# Altium PCB PCB.PcbDoc
Units mil, origin at the board's own origin, x right, y up, seen from the top; angles counter-clockwise.
Board outline 760 x 360 mil, 4 copper layers (Top Layer, Mid-Layer 1, Mid-Layer 2, Bottom Layer); 50 components, 32 nets, 152 pads, 68 vias.
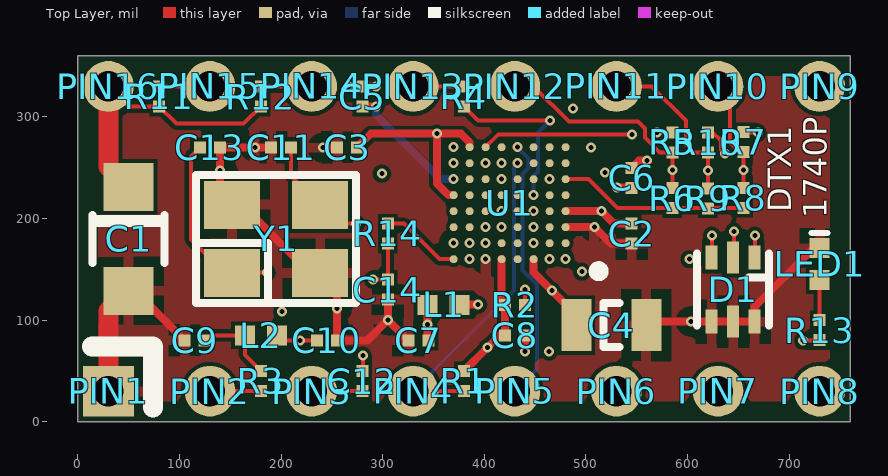
[diagram p0: Top Layer view]
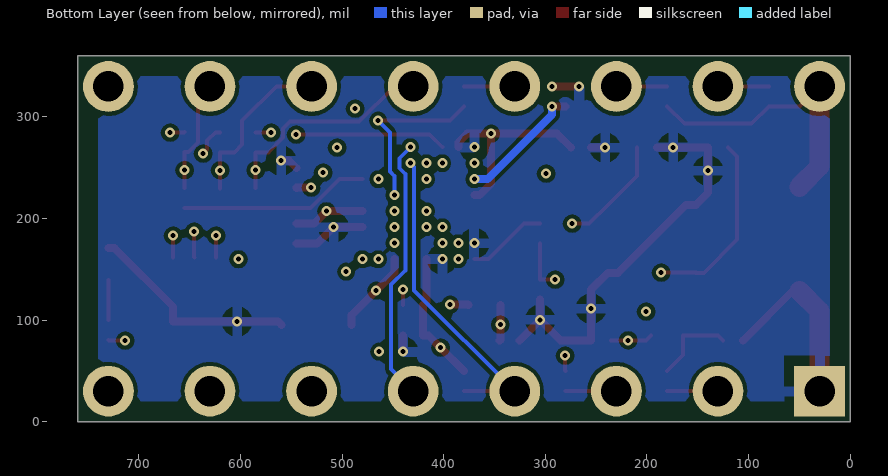
[diagram p1: Bottom Layer view, seen from below]
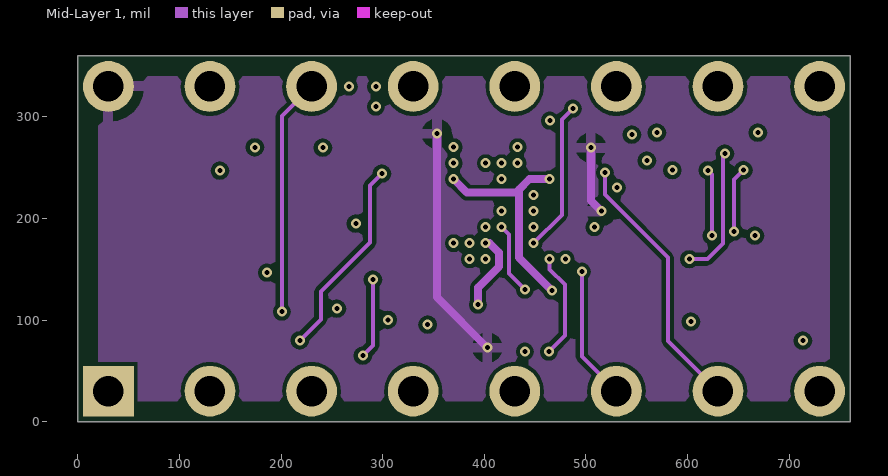
[diagram p2: Mid-Layer 1]
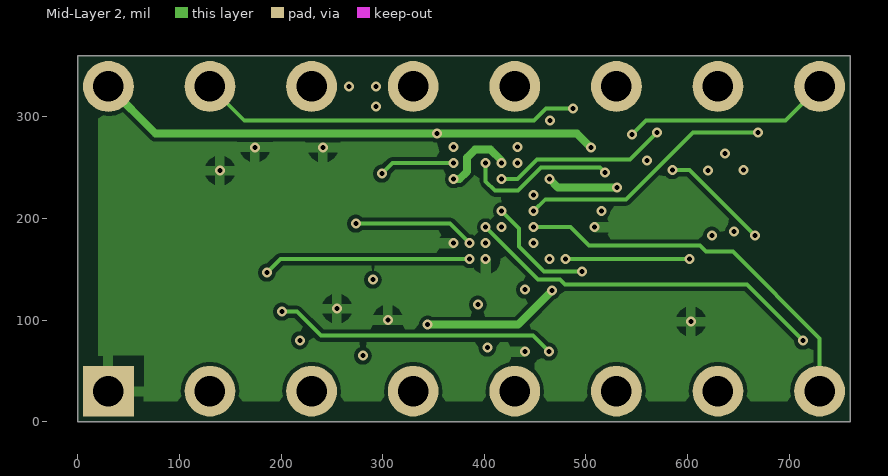
[diagram p3: Mid-Layer 2]

## Layer stack, top to bottom
Top Solder: solder mask 0.4, Solder Resist, Dk 3.5
Top Layer: signal copper 1.4
Dielectric1: core 12.6, FR-4, Dk 4.8
Mid-Layer 1: signal copper 1.4
Dielectric2: prepreg 12.6, FR-4, Dk 4.8
Mid-Layer 2: signal copper 1.4
Dielectric3: core 12.6, FR-4, Dk 4.8
Bottom Layer: signal copper 1.4
Bottom Solder: solder mask 0.4, Solder Resist, Dk 3.5

## Board outline
0,0 760,0 760,360 0,360

## Design rules (kind name [scope] priority, off if disabled: settings)
Clearance [All] p1: gap=3.94
ComponentClearance [All] p1: gap=7.87 collisioncheckmode=3 verticalgap=9.84 showdistances=FALSE
Height [All] p1: minheight=0 maxheight=3937.01 prefheight=39.37
HoleSize [All] p1: absolutevalues=TRUE maxlimit=984.25 minlimit=1 maxpercent=80.000 minpercent=20.000
HoleToHoleClearance [All] p1: gap=0 allowstackedmicrovias=TRUE
MinimumSolderMaskSliver [All] p1: minsoldermaskwidth=-3937.01
PolygonConnect [All] p1: connectstyle=Relief reliefconductorwidth=9.84 reliefentries=4 polygonreliefangle="90 Angle" airgapwidth=9.84
RoutingVias [All] p1: holewidth=3.94 width=9.84 viastyle="Through Hole" minholewidth=3.94 minwidth=9.84 maxholewidth=19.68 maxwidth=39.37
SilkToSilkClearance [All] p1: silktosilkclearance=-3937.01
SilkToSolderMaskClearance [IsPad] p1: minsilkscreentomaskgap=-3937.01 clearancetoexposedcopper=TRUE
SolderMaskExpansion [All] p1: expansion=4
Width [All] p1: maxlimit=98.43 minlimit=3.94 preferedwidth=3.94
23 further rules are at their usual default settings.

## Components (designator, comment, footprint, x,y, rotation, side; value= is the part's Value field where it differs from the comment)
C1 "33u/10V" "Case A (3216)" 50,180 r270 top locked
C2 "1n" _0201 545,185 r270 top
C3 "100n" _0201 265,270 r180 top
C4 "10u/10V" _0805+ 525,95 r0 top
C5 "1n" _0201 280,320 r90 top
C6 "100n" _0201 545,240 r90 top
C7 "1u" _0201 335,80 r180 top
C8 "1u" _0201 430,85 r0 top
C9 "10n" _0201 115,80 r0 top
C10 "1u" _0201 245,80 r180 top
C11 "18p" _0201 200,270 r0 top
C12 "470n" _0201 280,40 r270 top
C13 "18p" _0201 130,270 r180 top
C14 "10n" _0201 305,130 r90 top
D1 "BAS16VV" SOT666-6 645,130 r180 top
L1 "0R" _0402 360,115 r180 top
L2 "ACML-0402H-750-T" _0402 180,85 r0 top
LED1 "0402G" _0402+ 730,155 r270 top
PIN1 "Pin/Pad" "Pad T/H 45/90"#1 30,30 r0 top locked
PIN2 "Pin/Pad" "Pad T/H 45/90"#2 130,30 r0 top locked
PIN3 "Pin/Pad" "Pad T/H 45/90"#3 230,30 r0 top locked
PIN4 "Pin/Pad" "Pad T/H 45/90"#4 330,30 r0 top locked
PIN5 "Pin/Pad" "Pad T/H 45/90"#5 430,30 r0 top locked
PIN6 "Pin/Pad" "Pad T/H 45/90"#6 530,30 r0 top locked
PIN7 "Pin/Pad" "Pad T/H 45/90"#7 630,30 r0 top locked
PIN8 "Pin/Pad" "Pad T/H 45/90"#8 730,30 r0 top locked
PIN9 "Pin/Pad" "Pad T/H 45/90"#9 730,330 r0 top locked
PIN10 "Pin/Pad" "Pad T/H 45/90"#10 630,330 r0 top locked
PIN11 "Pin/Pad" "Pad T/H 45/90"#11 530,330 r0 top locked
PIN12 "Pin/Pad" "Pad T/H 45/90"#12 430,330 r0 top locked
PIN13 "Pin/Pad" "Pad T/H 45/90"#13 330,330 r0 top locked
PIN14 "Pin/Pad" "Pad T/H 45/90"#14 230,330 r0 top locked
PIN15 "Pin/Pad" "Pad T/H 45/90"#15 130,330 r0 top locked
PIN16 "Pin/Pad" "Pad T/H 45/90"#16 30,330 r0 top locked
R1 "100k" _0201 380,40 r90 top
R2 "10R" _0201 430,115 r180 top
R3 "1k" _0201 180,40.16 r90 top
R4 "1k" _0201 380,320 r90 top
R5 "510R" _0201 585,275 r90 top
R6 "1k" _0201 585,220 r90 top
R7 "510R" _0201 655,275.16 r90 top
R8 "1k" _0201 655,220.16 r90 top
R9 "1k" _0201 620,219.84 r90 top
R10 "510R" _0201 620,274.84 r90 top
R11 "100k" _0201 80,320 r270 top
R12 "100k" _0201 180,320 r270 top
R13 "1k" _0201 730,90 r270 top
R14 "1k" _0201 305,185 r90 top
U1 "ATSAM4S8BA-UUR" WLCSP64 425,215 r180 top locked
Y1 "CX3225GB12000P0HPQCC" "Crystal 32x25 (4)" 195,180 r0 top

## Footprints (in the part's own frame and the unit in brackets; to place one, negate y for a bottom-side part, rotate by r counter-clockwise, add the part's x,y. Pads: shape width x height; smd on the part's side, far side on the other; paste and mask are expansions set on the pad)
_0201 [mm] "Body 0.6x0.3mm"
  rect 0.3x0.3 smd: 1(-0.25,0) 2(0.25,0)
  body extent -0.32,-0.18 0.33,0.17, height 0.3
_0402 [mm]
  rect 0.5x0.5 smd: 1(-0.4,0) 2(0.4,0)
  body extent -0.53,-0.27 0.53,0.28, height 0.5
_0402+ [mm]
  rect 0.5x0.5 smd: 1(-0.4,0) 2(0.4,0)
  silkscreen extent -0.77,-0.2 -0.77,0.2, body extent -0.53,-0.27 0.53,0.28, height 0.5
_0805+ [mm]
  rect 0.75x1.3 smd: 1(-0.875,0) 2(0.875,0)
  silkscreen extent -0.2,-0.55 0.2,0.55, body extent -1.02,-0.65 1.02,0.65, height 0.85
"Case A (3216)" [mm]
  rect 1.2x1.25 smd: 1(-1.3,0) 2(1.3,0)
  silkscreen extent -0.6,-0.9 0.6,0.9, body extent -1.65,-0.85 1.65,0.85, height 1.6
"Crystal 32x25 (4)" [mm] "Crystal 3.2 x 2.5 mm, 4 pins"
  rect 1.4x1.2 smd: 1(-1.1,-0.85) 2(1.1,0.85) 3(-1.1,0.85) 3(1.1,-0.85)
  silkscreen extent -2,-1.6 2,1.6, body extent -1.6,-1.3 1.6,1.3, height 0.7
"Pad T/H 45/90"#1 [mil] "Single pad, through-hole, 45mil/90mil"
  rect 50x50 hole 30: 1(0,0)
"Pad T/H 45/90"#2 [mil] "Single pad, through-hole, 45mil/90mil"
  round 50 hole 30: 2(0,0)
"Pad T/H 45/90"#3 [mil] "Single pad, through-hole, 45mil/90mil"
  round 50 hole 30: 3(0,0)
"Pad T/H 45/90"#4 [mil] "Single pad, through-hole, 45mil/90mil"
  round 50 hole 30: 4(0,0)
"Pad T/H 45/90"#5 [mil] "Single pad, through-hole, 45mil/90mil"
  round 50 hole 30: 5(0,0)
"Pad T/H 45/90"#6 [mil] "Single pad, through-hole, 45mil/90mil"
  round 50 hole 30: 6(0,0)
"Pad T/H 45/90"#7 [mil] "Single pad, through-hole, 45mil/90mil"
  round 50 hole 30: 7(0,0)
"Pad T/H 45/90"#8 [mil] "Single pad, through-hole, 45mil/90mil"
  round 50 hole 30: 8(0,0)
"Pad T/H 45/90"#9 [mil] "Single pad, through-hole, 45mil/90mil"
  round 50 hole 30: 9(0,0)
"Pad T/H 45/90"#10 [mil] "Single pad, through-hole, 45mil/90mil"
  round 50 hole 30: 10(0,0)
"Pad T/H 45/90"#11 [mil] "Single pad, through-hole, 45mil/90mil"
  round 50 hole 30: 11(0,0)
"Pad T/H 45/90"#12 [mil] "Single pad, through-hole, 45mil/90mil"
  round 50 hole 30: 12(0,0)
"Pad T/H 45/90"#13 [mil] "Single pad, through-hole, 45mil/90mil"
  round 50 hole 30: 13(0,0)
"Pad T/H 45/90"#14 [mil] "Single pad, through-hole, 45mil/90mil"
  round 50 hole 30: 14(0,0)
"Pad T/H 45/90"#15 [mil] "Single pad, through-hole, 45mil/90mil"
  round 50 hole 30: 15(0,0)
"Pad T/H 45/90"#16 [mil] "Single pad, through-hole, 45mil/90mil"
  round 50 hole 30: 16(0,0)
SOT666-6 [mm] "SOT666, 6 pins, 0.5mm pitch1.7 x 1.7mm"
  rect 0.3x0.6 smd: 1(-0.537,-0.8) 3(0.537,-0.8) 4(0.537,0.8) 6(-0.537,0.8)
  rect 0.3x0.8 smd: 2(0,-0.8) 5(0,0.8)
  silkscreen extent -0.9,-0.9 0.9,0.9, body extent -0.9,-0.9 0.9,0.9, height 0.55
WLCSP64 [mm] "BGA, 64-Leads, Body 4.42x3.42mmx0.53mm, Pitch 0.40mm"
  round 0.2 smd: A1(-1.4,1.4) A2(-1,1.4) A3(-0.6,1.4) A4(-0.2,1.4) A5(0.2,1.4) A6(0.6,1.4) A7(1,1.4) A8(1.4,1.4) B1(-1.4,1) B2(-1,1) B3(-0.6,1) B4(-0.2,1) B5(0.2,1) B6(0.6,1) B7(1,1) B8(1.4,1) C1(-1.4,0.6) C2(-1,0.6) C3(-0.6,0.6) C4(-0.2,0.6) C5(0.2,0.6) C6(0.6,0.6) C7(1,0.6) C8(1.4,0.6) D1(-1.4,0.2) D2(-1,0.2) D3(-0.6,0.2) D4(-0.2,0.2) D5(0.2,0.2) D6(0.6,0.2) D7(1,0.2) D8(1.4,0.2) E1(-1.4,-0.2) E2(-1,-0.2) E3(-0.6,-0.2) E4(-0.2,-0.2) E5(0.2,-0.2) E6(0.6,-0.2) E7(1,-0.2) E8(1.4,-0.2) F1(-1.4,-0.6) F2(-1,-0.6) F3(-0.6,-0.6) F4(-0.2,-0.6) F5(0.2,-0.6) F6(0.6,-0.6) F7(1,-0.6) F8(1.4,-0.6) G1(-1.4,-1) G2(-1,-1) G3(-0.6,-1) G4(-0.2,-1) G5(0.2,-1) G6(0.6,-1) G7(1,-1) G8(1.4,-1) H1(-1.4,-1.4) H2(-1,-1.4) H3(-0.6,-1.4) H4(-0.2,-1.4) H5(0.2,-1.4) H6(0.6,-1.4) H7(1,-1.4) H8(1.4,-1.4)
  silkscreen extent -2.35,1.58 -2.1,1.82, body extent -2.21,-1.71 2.21,1.71, height 0.54

## Part data
C1 C4: library part Capacitor+, "Polar capacitor"
C2 C3 C5 C6 C7 C8 C9 C10 C11 C12 C13 C14: library part Capacitor, "Capacitor"
D1: library part "Diode Triple", "Diode (triple)"
L1 L2: library part Inductor, "Inductor"
LED1: library part LED, "Light Emitting Diode"
PIN1 PIN2 PIN3 PIN4 PIN5 PIN6 PIN7 PIN8 PIN9 PIN10 PIN11 PIN12 PIN13 PIN14 PIN15 PIN16: "Single pin/pad"
R1 R2 R3 R4 R5 R6 R7 R8 R9 R10 R11 R12 R13 R14: library part Resistor, "Resistor"
U1: library part "AT91SAM4S16Bx WLCSP64", "ARM Cortex M4-based Flash MCU"
Y1: library part "Crystal (ground)", "Crystal Resonator"

## Via types
v1: diameter 9.84, hole 4.92, Top Layer to Bottom Layer, tented both sides, 45 vias
v2: diameter 9.84, hole 4.92, Top Layer to Bottom Layer, tented bottom, 23 vias

## Nets (pads, with @x,y where several pads share a name; then routed paths per layer and width w, separated by ;. In a path a pad name is that pad's centre, name@x,y a point inside that pad or via, vN(x,y) a via of type N, cw(c..) or ccw(c..) an arc to the next point about the centre after c; other vN are vias at no path point)
+3V3: C1.1 C2.1 C3.1 C8.1 PIN16.16 R1.2 R2.2 R11.2 R12.2 U1.A5 U1.D1 U1.E8 U1.H7 | length 1473.2
  Top Layer w3.94: PIN16.16 49.84,310.16 R11.2 96.85,293.31 163.15,293.31 R12.2
  Top Layer w7.87: C3.1 288.31,283.46 v1(353.35,283.46) ; U1.E8 364.72,222.87 353.35,234.25 v1(353.35,283.46) ; R1.2 v1(402.99,72.83) 415.16,85 C8.1 R2.2 417.13,118.03 U1.A5 ; U1.H7 385.63,274.8 376.97,283.46 v1(353.35,283.46) ; U1.D1 v1(515.31,207.13) 527.6,194.84 C2.1
  Top Layer w19.68: PIN16.16 30,251.18 C1.1
  Mid-Layer 1 w7.87: v1(353.35,283.46) 353.35,122.48 v1(402.99,72.83) ; v1(504.92,269.68) 504.92,217.52 v1(515.31,207.13)
  Mid-Layer 2 w7.87: PIN16.16 76.54,283.46 v1(353.35,283.46) 491.14,283.46 v1(504.92,269.68)
B: R7.2 U1.D3 | length 267.2
  Top Layer w3.94: R7.2 655.55,284.45 v1(669.29,284.45)
  Mid-Layer 2 w3.94: v2(448.62,207.13) 460,218.5 539.37,218.5 605.32,284.45 v1(669.29,284.45)
G: R10.2 U1.A1 | length 281.1
  Top Layer w3.94: R10.2 624.76,284.69 632.87,276.57 632.87,267.72 v1(636.81,263.78)
  Mid-Layer 1 w3.94: v1(601.93,159.88) 619.53,159.88 634.84,175.2 634.84,261.81 v1(636.81,263.78)
  Mid-Layer 2 w3.94: v2(480.12,159.88) v1(601.93,159.88)
GND: C1.2 C2.2 C3.2 C4.2 C5.2 C6.2 C7.2 C8.2 C9.1 C10.1 C11.1 C13.1 C14.1 D1.4 D1.5 D1.6 LED1.1 PIN1.1 U1.A6 U1.B8 U1.C1 U1.H8 Y1.3 | length 945.9
  Top Layer w7.87: C1.2 56.34,128.82 C9.1 ; C11.1 v1(174.21,270) C13.1 v1(139.84,247.05) 139.84,225.31 151.69,213.46 161.54,213.46 228.46,146.54 238.31,146.54 254.84,130 C10.1 284.84,80 v1(305,100.16) ; v1(241.14,269.69) 254.84,269.69 C3.2 ; v1(266.73,329.72) 279.88,329.72 C5.2 293.19,329.84 v1(293.31,329.72) ; C14.1 v1(305,100.16) ; C7.2 v1(305,100.16) ; C8.2 439.96,84.88 v1(439.96,68.9) ; U1.C1 v1(508.43,191.38) 524.65,175.16 C2.2 ; C6.2 552.05,256.89 v1(560.04,256.89) ; C4.2 562.95,98.5 v1(603.35,98.5) D1.4 D1.5 D1.6 666.16,113.01 723.9,170.75 LED1.1
  Top Layer w19.68: PIN1.1 30,108.82 C1.2
  other v1: 254.92,111.22
  other v2: 401.38,159.88 369.88,175.63 369.88,270.12
NetC4_1: C4.1 C5.1 C6.1 C7.1 L1.2 U1.A3 U1.F2 U1.F8 U1.G5 | length 754.5
  Top Layer w7.87: C5.1 293.19,310.16 v1(293.31,310.04) ; L1.2 v1(344.25,95.47) 344.25,80.59 C7.1 ; U1.A3 448.62,146.85 490.55,104.92 C4.1 ; v1(530.51,230.31) 544.84,230.31 C6.1
  Mid-Layer 1 w7.87: v2(369.88,238.62) 383.11,225.39 431.1,225.39 434.06,228.35 ; v2(464.37,238.62) 444.33,238.62 434.06,228.35 ; v1(466.54,128.94) 434.06,161.42 434.06,228.35
  Mid-Layer 2 w7.87: v1(344.25,95.47) 433.07,95.47 v1(466.54,128.94) ; v2(369.88,238.62) 375.43,238.62 382.87,246.06 382.87,259.84 390.75,267.72 406.13,267.72 417.13,256.72 v2(417.13,254.37) ; v2(464.37,238.62) 472.68,230.31 v1(530.51,230.31)
  Bottom Layer w7.87: v1(293.31,310.04) 293.31,302.17 356.85,238.62 v2(369.88,238.62)
NetC9_2: C9.2 L2.1 R3.2 | length 83
  Top Layer w3.94: C9.2 129.84,85 L2.1 164.25,65.75 R3.2
NetC10_2: C10.2 L2.2 U1.G8 | length 313.9
  Top Layer w3.94: L2.2 200.75,80 v1(218.5,80) C10.2
  Mid-Layer 1 w3.94: v1(218.5,80) 239.17,100.67 239.17,127.95 287.4,176.18 287.4,232.28 v1(299.21,244.09)
  Mid-Layer 2 w3.94: v1(299.21,244.09) 309.49,254.37 v2(369.88,254.37)
NetC11_2: C11.2 U1.B7 Y1.2 | length 231.3
  Top Layer w3.94: C11.2 209.84,241.93 Y1.2 256.89,194.88 v1(273.62,194.88)
  Mid-Layer 2 w3.94: v1(273.62,194.88) 366.38,194.88 v2(385.63,175.63)
NetC12_1: C12.1 C14.2 R14.1 | length 144.2
  Top Layer w3.94: C12.1 280.51,50.35 v1(280.51,64.96) ; v1(290.35,139.76) 304.92,139.76 C14.2 R14.1
  Mid-Layer 1 w3.94: v1(280.51,64.96) 290.35,74.8 v1(290.35,139.76)
NetC13_2: C13.2 U1.A7 Y1.1 | length 388
  Top Layer w3.94: C13.2 111.22,261.06 111.22,179.13 143.82,146.54 Y1.1 151.81,146.65 v1(186.02,146.65)
  Mid-Layer 2 w3.94: v1(186.02,146.65) 199.25,159.88 v2(385.63,159.88)
NetL1_1: L1.1 U1.B6 | length 94.6
  Top Layer w7.87: L1.1 375.91,115.16 v1(393.7,115.16)
  Mid-Layer 1 w7.87: v1(393.7,115.16) 393.7,131.89 414.37,152.56 414.37,166.34 405.08,175.63 v2(401.38,175.63)
NetLED1_2: LED1.2 R13.1 | length 39.4
  Top Layer w3.94: R13.1 LED1.2
NetR2_1: R2.1 U1.C5 | length 85.9
  Top Layer w3.94: R2.1 439.96,115.12 v1(439.96,129.92)
  Mid-Layer 1 w3.94: v2(417.13,191.38) 424.21,184.29 424.21,145.67 v1(439.96,129.92)
NetR4_1: R4.1 U1.E3 | length 170.3
  Top Layer w3.94: R4.1 393.9,296.26 v1(464.57,296.26)
  Bottom Layer w3.94: v2(448.62,222.87) 448.62,241.93 452.76,246.06 452.76,284.45 v1(464.57,296.26)
NetR6_1: R6.1 R8.1 R9.1 U1.F1 | length 186.7
  Top Layer w3.94: U1.F1 502.52,238.62 530.98,210.16 R6.1 654.84,210.16 R8.1
NetR13_2: R13.2 U1.C6 | length 375
  Top Layer w3.94: v1(713.58,79.72) 729.57,79.72 R13.2
  Mid-Layer 2 w3.94: v2(401.38,191.38) 452.99,139.76 474.41,139.76 479.33,134.84 658.46,134.84 v1(713.58,79.72)
NetR14_2: R14.2 U1.A8 | length 79.4
  Top Layer w3.94: R14.2 320.91,194.84 355.87,159.88 U1.A8
PIN2: PIN2.2 R3.1 | length 50.1
  Top Layer w3.94: PIN2.2 130.32,30.31 R3.1
PIN3: C12.2 PIN3.3 | length 50.1
  Top Layer w3.94: PIN3.3 230.16,30.16 C12.2
PIN4: PIN4.4 R1.1 U1.G4 | length 317
  Top Layer w3.94: PIN4.4 330.16,30.16 R1.1
  Bottom Layer w3.94: PIN4.4 429.13,129.13 429.13,250.63 v2(432.87,254.37)
PIN5: PIN5.5 U1.H4 | length 261.9
  Bottom Layer w3.94: PIN5.5 451.77,51.77 451.77,134.84 437.8,148.82 437.8,243.9 443.7,249.8 443.7,258.85 432.87,269.68 v2(432.87,270.12)
PIN6: PIN6.6 U1.D5 | length 245.8
  Mid-Layer 1 w3.94: v1(496.06,147.64) 496.06,63.94 PIN6.6
  Mid-Layer 2 w3.94: v2(417.13,207.13) 434.06,190.2 434.06,172.24 458.66,147.64 v1(496.06,147.64)
PIN7: PIN7.7 U1.G6 | length 411.6
  Mid-Layer 1 w3.94: v1(518.7,245.08) 518.7,223.43 580.71,161.42 580.71,79.29 PIN7.7
  Mid-Layer 2 w3.94: v2(401.38,254.37) 401.38,236.42 410.43,227.36 433.07,227.36 455.71,250 513.78,250 v1(518.7,245.08)
PIN8: PIN8.8 U1.C3 | length 378.7
  Mid-Layer 2 w3.94: v2(448.62,191.38) 484.8,191.38 502.95,173.23 612.2,173.23 618.11,167.32 644.69,167.32 730,82.01 PIN8.8
PIN9: PIN9.9 U1.H6 | length 353.4
  Top Layer w3.94: U1.H6 413.74,282.48 v1(545.28,282.48)
  Mid-Layer 2 w3.94: v1(545.28,282.48) 559.06,296.26 696.26,296.26 PIN9.9
PIN10: D1.2 PIN10.10 R7.1 R8.2 | length 203
  Top Layer w3.94: PIN10.10 641.73,318.27 641.73,274.61 651.02,265.31 R7.1 v1(655,247.66) R8.2 ; D1.2 645.67,162.17 v1(645.67,187.01)
  Mid-Layer 1 w3.94: v1(645.67,187.01) 645.67,238.33 v1(655,247.66)
PIN11: D1.3 PIN11.11 R9.2 R10.1 | length 253.7
  Top Layer w3.94: PIN11.11 564.68,330 598.43,296.26 598.43,272.64 606.06,265 R10.1 v1(620,247.34) R9.2 ; D1.3 624.02,161.67 v1(624.02,183.07)
  Mid-Layer 1 w3.94: v1(620,247.34) 624.02,243.33 v1(624.02,183.07)
PIN12: D1.1 PIN12.12 R5.1 R6.2 | length 352
  Top Layer w3.94: PIN12.12 448.54,330 483.27,295.28 551.18,295.28 558.07,288.39 558.07,279.53 572.44,265.16 R5.1 v1(585,247.5) R6.2 ; D1.1 666.34,161.67 v1(666.34,183.07)
  Mid-Layer 2 w3.94: v1(585,247.5) 601.91,247.5 v1(666.34,183.07)
PIN13: PIN13.13 R4.2 | length 50.1
  Top Layer w3.94: PIN13.13 330.16,329.84 R4.2
PIN14: PIN14.14 R12.1 U1.A2 | length 666.7
  Top Layer w3.94: R12.1 229.84,329.84 PIN14.14
  Mid-Layer 1 w3.94: v1(200.79,108.27) 200.79,300.79 PIN14.14 ; v1(463.58,68.9) 479.33,84.65 479.33,134.84 464.37,149.8 v2(464.37,159.88)
  Mid-Layer 2 w3.94: v1(200.79,108.27) 215.55,108.27 239.17,84.65 447.83,84.65 v1(463.58,68.9)
PIN15: PIN15.15 R11.1 U1.B3 | length 574.6
  Top Layer w3.94: R11.1 129.84,329.84 PIN15.15
  Mid-Layer 1 w3.94: v2(448.62,175.63) 476.38,203.39 476.38,297.24 v1(487.2,308.07)
  Mid-Layer 2 w3.94: PIN15.15 163.74,296.26 448.82,296.26 460.63,308.07 v1(487.2,308.07)
R: R5.2 U1.F5 | length 187
  Top Layer w3.94: v1(569.88,284.45) 584.61,284.45 R5.2
  Mid-Layer 2 w3.94: v2(417.13,238.62) 432.52,238.62 451.77,257.87 543.31,257.87 v1(569.88,284.45)
pads on no net: U1.A4 U1.B1 U1.B2 U1.B4 U1.B5 U1.C2 U1.C4 U1.C7 U1.C8 U1.D2 U1.D4 U1.D6 U1.D7 U1.D8 U1.E1 U1.E2 U1.E4 U1.E5 U1.E6 U1.E7 U1.F3 U1.F4 U1.F6 U1.F7 U1.G1 U1.G2 U1.G3 U1.G7 U1.H1 U1.H2 U1.H3 U1.H5

## Polygon pours and split planes (outlines as drawn)
GND on Bottom Layer "GND-B" (solid, remove dead copper, pour order 8): 20,20 740,20 740,340 20,340 20,20
GND on Mid-Layer 2 "GND-2" (solid, remove dead copper, pour order 6): 20,20 740,20 740,340 20,340 20,20
+3V3 on Mid-Layer 1 "3V3-1" (solid, remove dead copper, pour order 4): 20,20 740,20 740,340 20,340 20,20
GND on Top Layer "GND-T" (solid, remove dead copper, pour order 2): 20,20 740,20 740,340 20,340 20,20

## Silkscreen, mask and mechanical layers (free items; w line width, h text height)
Top Overlay:
  lines w19.68: 13.78,73.82 73.82,73.82 73.82,13.78
  text "DTX1" at 710,205.98 h39.37 r90
  text "1740P" at 745,200 h39.37 r90
Mechanical 1:
  the board outline again, w7.87